# Altium PCB PCB2.PcbDoc
Units mil, origin at the board's own origin, x right, y up, seen from the top; angles counter-clockwise.
Board outline 3860 x 3510 mil, 2 copper layers (Top Layer, Bottom Layer); 31 components, 31 nets, 145 pads, 40 vias.
Unrouted connection lines stored in the file: 1.
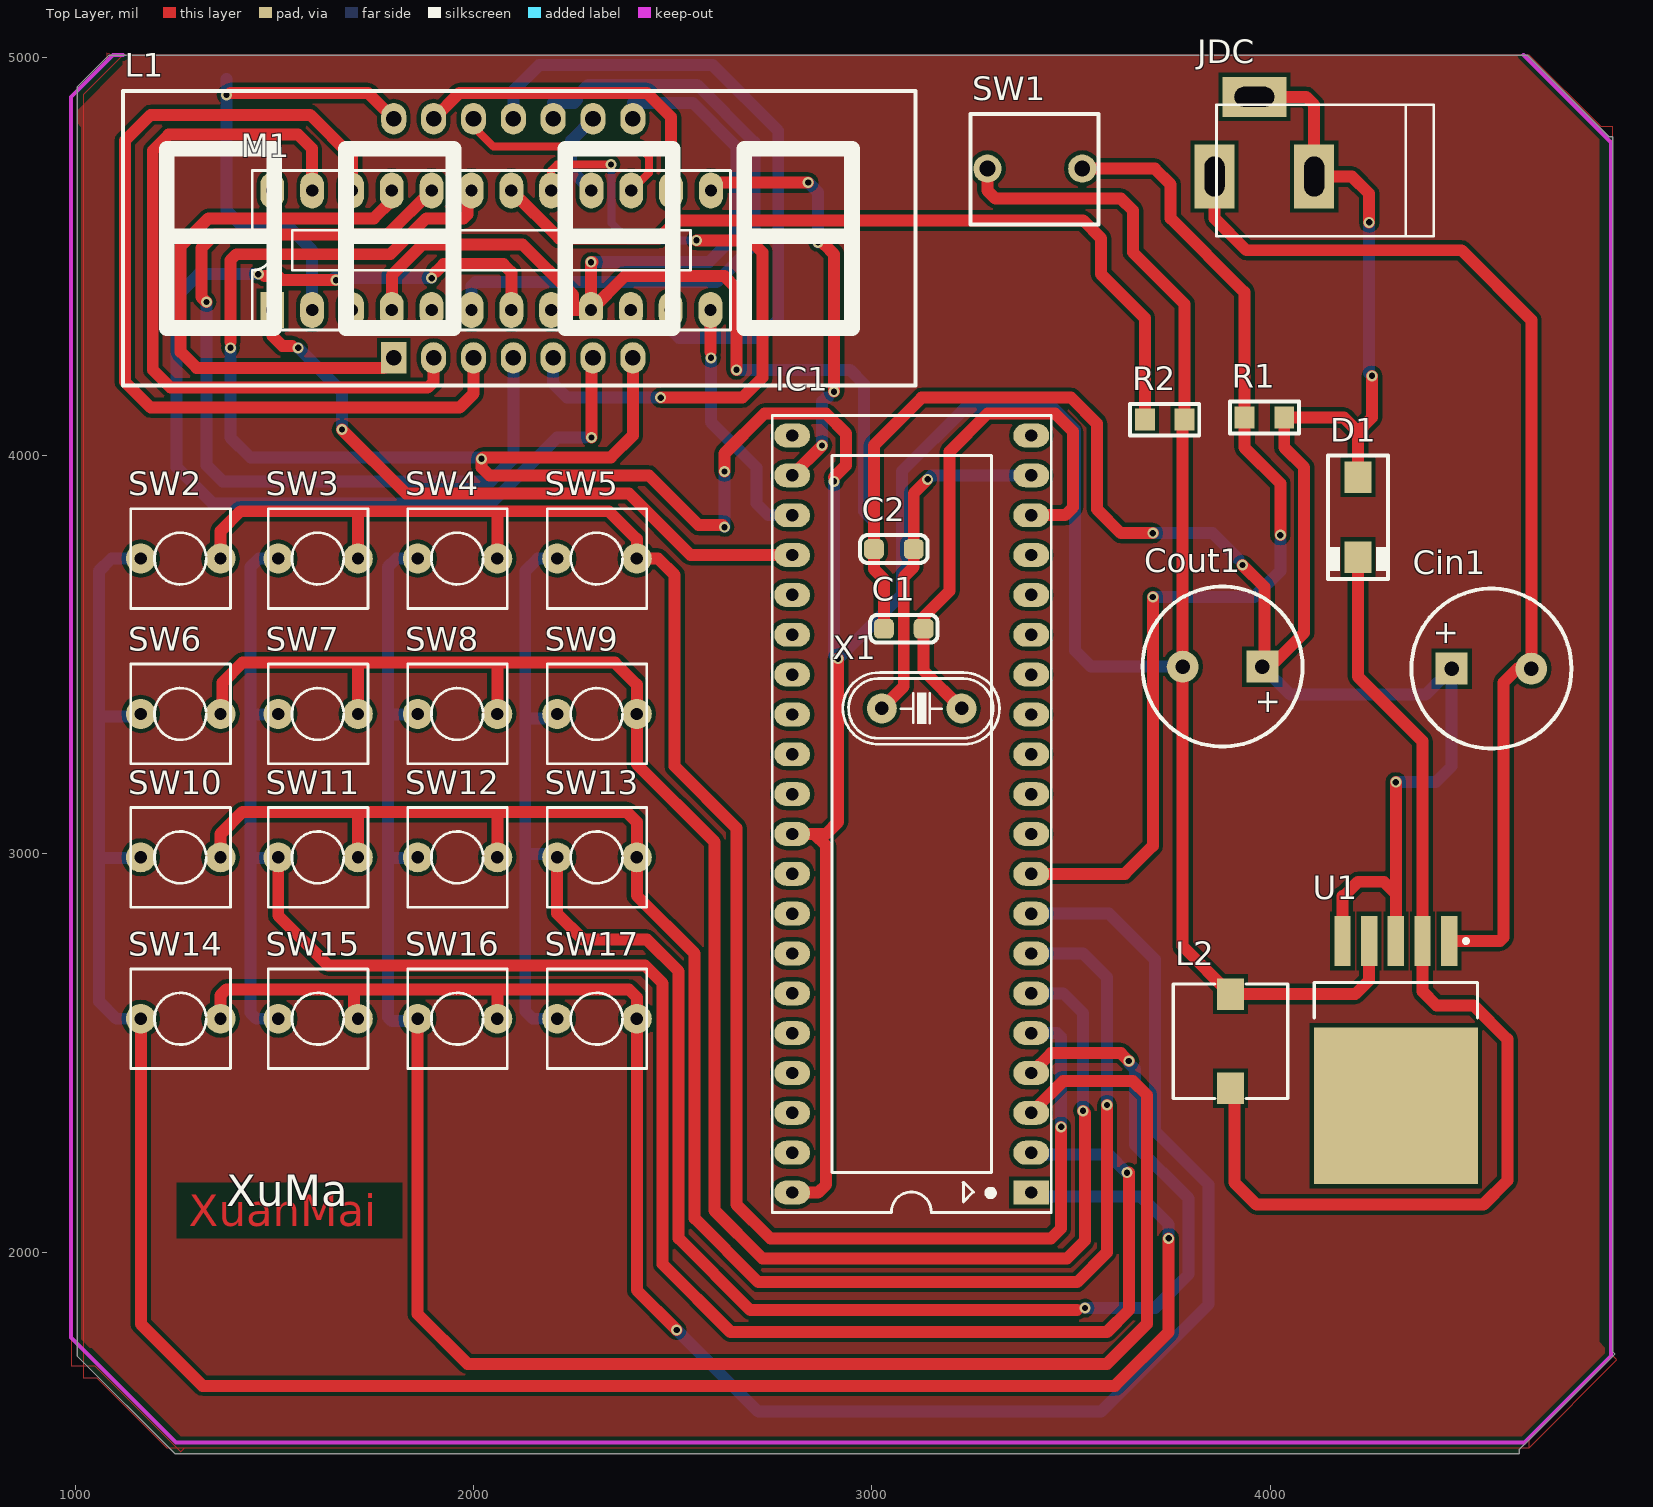
[diagram p0: Top Layer view]
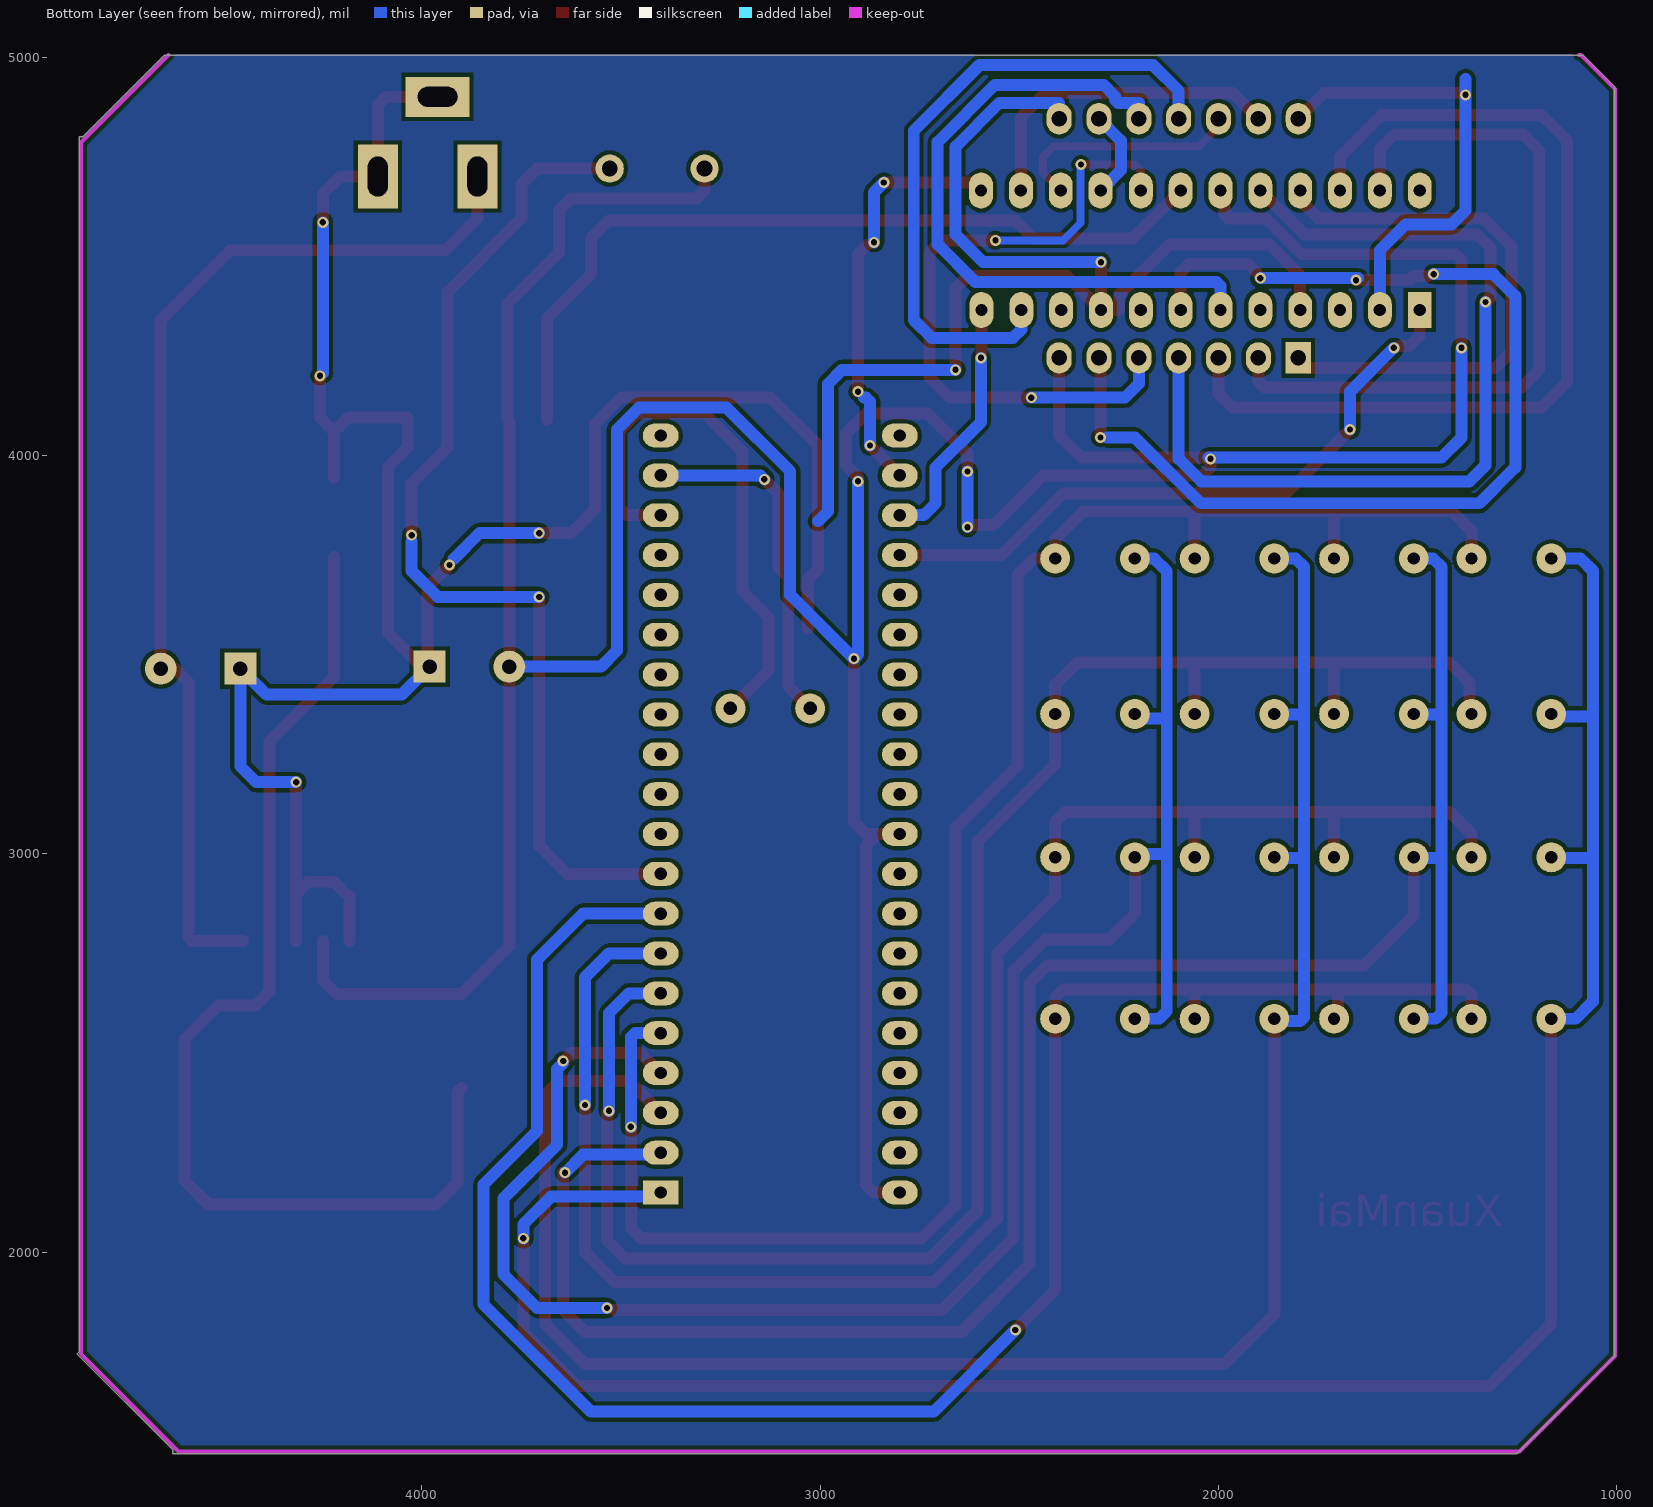
[diagram p1: Bottom Layer view, seen from below]

## Layer stack, top to bottom
Top Solder: solder mask 0.4, Solder Resist, Dk 3.5
Top Layer: signal copper 1.4
Dielectric 1: dielectric 12.6, FR-4, Dk 4.8
Bottom Layer: signal copper 1.4
Bottom Solder: solder mask 0.4, Solder Resist, Dk 3.5

## Board outline
1085,5005 1005,4925 1005,1740 1250,1495 4625,1495 4625,1505 4865,1745 4860,1750 4860,4800 4850,4800 4645,5005

## Design rules (kind name [scope] priority, off if disabled: settings)
Clearance [All] p1: gap=10 ignorepadtopadclearanceinfootprint=FALSE
PolygonConnect [All] p1: connectstyle=Relief reliefconductorwidth=10 reliefentries=4 polygonreliefangle="90 Angle" airgapwidth=10
RoutingVias [All] p1: holewidth=15.75 width=27.56 viastyle="Through Hole" minholewidth=15.75 minwidth=23.62 maxholewidth=19.68 maxwidth=27.56
SolderMaskExpansion [All] p1: expansion=4
Width [All] p1: maxlimit=40 minlimit=20 preferedwidth=30
30 further rules are at their usual default settings.

## Classes and differential pairs
component class Designator: SW2 SW3 SW4 SW5 SW6 SW7 SW8 SW9 SW10 SW11 SW12 SW13 SW14 SW15 SW16 SW17
component class "[05] - POWER": Cin1 Cout1 D1 JDC L2 U1
component class "[03] - LED7SEG": M1 R2
component class "[02] - MCU": C1 C2 IC1 R1 SW1 X1

## Components (designator, comment, footprint, x,y, rotation, side; value= is the part's Value field where it differs from the comment)
C1 "22pF" CAP_0805 3080,3565 r0 top value=103
C2 "22pF" CAP_0805 3055,3765 r0 top value=103
Cin1 "680uF" CAP_D10 4455,3465 r0 top value=100pF
Cout1 "220uF" CAP_D10 3980,3470 r180 top value=100pF
D1 "1N5822" SMA 4220,3845 r270 top value="Diode c?m 1N5408"
IC1 "AT89C52" DIP40/W0.6 3400,2150 r90 top
JDC "Jac DC" DC-IN 3985,4800 r180 top
L1 "Led 7 Seg 4 digit - Anode" LED7SEG-4-0.56-RG 2120,4540 r0 top
L2 "33uH" L-SMD-M-7.3x4.5 3900,2530 r180 top value="150 mH"
M1 "MAX7219ENG" DIP24/W0.3 1495,4365 r0 top
R1 "10k" RES_SMD_0805 3985,4095 r180 top value="R1W - 100"
R2 "10k" RES_SMD_0805 3735,4090 r0 top value="R1/4W - 1K"
SW1 "SW-2P-S" SW-2P-S 3528,4620 r180 top
SW2 "SW" SW2 1165,3741.22 r0 top value="SW chip 2 pin"
SW3 "SW" SW2 1510,3741.22 r0 top value="SW chip 2 pin"
SW4 "SW" SW2 1860,3741.22 r0 top value="SW chip 2 pin"
SW5 "SW" SW2 2210,3741.22 r0 top value="SW chip 2 pin"
SW6 "SW" SW2 1165,3351.22 r0 top value="SW chip 2 pin"
SW7 "SW" SW2 1510,3351.22 r0 top value="SW chip 2 pin"
SW8 "SW" SW2 1860,3351.22 r0 top value="SW chip 2 pin"
SW9 "SW" SW2 2210,3351.22 r0 top value="SW chip 2 pin"
SW10 "SW" SW2 1165,2991.22 r0 top value="SW chip 2 pin"
SW11 "SW" SW2 1510,2991.22 r0 top value="SW chip 2 pin"
SW12 "SW" SW2 1860,2991.22 r0 top value="SW chip 2 pin"
SW13 "SW" SW2 2210,2991.22 r0 top value="SW chip 2 pin"
SW14 "SW" SW2 1165,2586.22 r0 top value="SW chip 2 pin"
SW15 "SW" SW2 1510,2586.22 r0 top value="SW chip 2 pin"
SW16 "SW" SW2 1860,2586.22 r0 top value="SW chip 2 pin"
SW17 "SW" SW2 2210,2586.22 r0 top value="SW chip 2 pin"
U1 "LM2976" TO-263 4315,2545 r270 top
X1 "12Mhz" XT2 3125,3365 r0 top value=4Mhz

## Footprints (in the part's own frame and the unit in brackets; to place one, negate y for a bottom-side part, rotate by r counter-clockwise, add the part's x,y. Pads: shape width x height; smd on the part's side, far side on the other; paste and mask are expansions set on the pad)
CAP_0805 [mil]
  rrect50% 50x50 smd: 1(-50,0) 2(50,0)
  silkscreen extent -85,-35 85,35, body extent -40,-25 40,25, height 24
CAP_D10 [mil]
  rect 80x80 hole 36: 1(0,0)
  round 80 hole 36: 2(200,0)
  silkscreen extent -101,-201 301,201, body extent -107,-207 307,207, height 551
DC-IN [mil] "Jac DC input"
  rect 100x160 hole 50 slot 100 at 90 deg: 1(125,100) 2(-125,100)
  rect 160x100 hole 50 slot 100 at 0 deg: 3(25,-100)
  silkscreen extent -425,-80 120,250, body extent -410,-105 134,269, height 434
DIP24/W0.3 [mil] "DIP24/W.300, Pin to pin 100mil"
  rect 60x90 hole 31: 1(0,0)
  oval 60x90 hole 31: 2(100,0) 3(200,0) 4(300,0) 5(400,0) 6(500,0) 7(600,0) 8(700,0) 9(800,0) 10(900,0) 11(1000,0) 12(1100,0) 13(1101,300) 14(1001,300) 15(901,300) 16(801,300) 17(700,300) 18(600,300) 19(500,300) 20(400,300) 21(300,300) 22(200,300) 23(100,300) 24(0,300)
  silkscreen extent -50,-50 1150,350, body extent -89,-3 1181,307, height 200
DIP40/W0.6 [mil] "40 PIN, W 600mil, Pin to pin 100mil"
  rect 60x90 hole 31: 1(0,0)
  oval 60x90 hole 31: 2(100,0) 3(200,0) 4(300,0) 5(400,0) 6(500,0) 7(600,0) 8(700,0) 9(800,0) 10(900,0) 11(1000,0) 12(1100,0) 13(1200,0) 14(1300,0) 15(1400,0) 16(1500,0) 17(1600,0) 18(1700,0) 19(1800,0) 20(1900,0) 21(1900,600) 22(1800,600) 23(1700,600) 24(1600,600) 25(1500,600) 26(1400,600) 27(1300,600) 28(1200,600) 29(1100,600) 30(1000,600) 31(900,600) 32(800,600) 33(700,600) 34(600,600) 35(500,600) 36(400,600) 37(300,600) 38(200,600) 39(100,600) 40(0,600)
  silkscreen extent -50,-50 1950,650, body extent -82,-10 1982,600, height 224
L-SMD-M-7.3x4.5 [mm] "WE-PDA SMD Shielded Power Inductor, 7345"
  rect 1.7x2 smd: 1(0,3) 2(0,-3)
  silkscreen extent -3.65,-3.65 3.65,3.65, body extent -3.65,-3.65 3.65,3.65, height 4.05
LED7SEG-4-0.56-RG [mil]
  round 60 on Top Overlay: 0(-535,-205) 0(-85,-205) 0(465,-205) 0(915,-205)
  round 118.11 on Top Overlay: 0(-20,-95) 0(-20,155)
  rect 62.99x78.74 hole 39.37: 1(-320,-295)
  oval 62.99x78.74 hole 39.37: 2(-220,-295) 3(-120,-295) 4(-20,-295) 5(80,-295) 6(180,-295) 7(280,-295) 8(280,305) 9(180,305) 10(80,305) 11(-20,305) 12(-120,305) 13(-220,305) 14(-320,305)
  silkscreen extent -1000,-365 990,375, body extent -995,-370 985,378, height 565
RES_SMD_0805 [mil]
  rect 50x55 smd: 1(-50,0) 2(50,0)
  silkscreen extent -87,-40 87,39, body extent -45,-27 45,27, height 30
SMA [mm]
  rect 2x1.7 smd: 1(-2.544,0) 2(2.544,0)
  silkscreen extent -3.94,-1.9 3.94,1.91, body extent -2.87,-1.4 2.87,1.4, height 2.29
SW2 [mil] "SW button 2pin, 250x 250 mil"
  round 75 hole 31: 1(0,0) 2(200,0)
  silkscreen extent -25,-125 225,125
SW-2P-S [mm]
  round 1.8 hole 1: 1(0,-2.54) 2(6.045,-2.54)
  silkscreen extent -1.04,-6.02 7.14,1.02
TO-263 [mm]
  rect 3.2x1.05 smd: 1(-6,3.4) 2(-6,1.7) 3(-6,0) 4(-6,-1.7) 5(-6,-3.4)
  rect 10x10.45 smd: 6(4.5,0)
  silkscreen extent -6.12,-5.2 -1.1,5.2, body extent -6.58,-5.2 7.57,5.2, height 4.65
XT2 [mil] "Footpin for Crystal 2 pin"
  round 75 hole 34: 1(-100,0) 2(100,0)
  silkscreen extent -198,-90 195,90, body extent -233,-93 213,90, height 138

## Part data
C1 C2: library part C, "Cap SMD"
Cin1 Cout1: library part CAP, "Cap np  1pF - 472pF"
D1: "Schottky Rectifiers"
IC1: "Atmel AT89C52, 8k Byte Flash Memory , 40 Pin"
JDC: library part DCIN, "Jac DC input"
L1: library part LED7SEG-4-RG
L2: library part Inductor, "Inductor"
M1: "Serially Interfaced, 8-Digit LED Display Driver", Code_JEDEC=MS-001-AF, ComponentLink1Description="Manufacturer Link", ComponentLink1URL=http://www.maxim-ic.com/, ComponentLink2Description=Datasheet, ComponentLink2URL=http://pdfserv.maxim-ic.com/en/ds/MAX7219-MAX7221.pdf, DatasheetVersion=Jul-1997, LatestRevisionDate=29-May-2009, LatestRevisionNote="Component Body Added.", PackageDescription="DIP, 24-Pin, Row Spacing 7.62 mm, Pitch 2.54 mm", PackageReference=NG24A, PackageVersion=1997, Published=16-Jan-2001, Publisher="Altium Limited"
R1: library part R1W, "Resistor 1W"
R2: library part R1/4W, "Resistor 1/4W"
SW1: library part SW-2PIN-SMALL, "Switch Small 2 Pin", LatestRevisionDate=17-Jul-2002, LatestRevisionNote="Re-released for DXP Platform.", PackageReference=SPST-2, Published=24-Mar-1999, Publisher="Altium Limited"
SW2 SW3 SW4 SW5 SW6 SW7 SW8 SW9 SW10 SW11 SW12 SW13 SW14 SW15 SW16 SW17: library part SW2, "Switch button 2 pin"
U1: library part LM2596, Max Input Voltage="12 V", Max Output Current="3 (6.0 peak) A", Max Output Voltage=mV, Temperature Range="-40 to +125 degC", Category=IC-Power, Min Input Voltage=mV, Min Output Voltage=mV, Mounting Technology="Surface Mount", Status=Unreleased, Supply Voltage=mV
X1: library part XT2, "Crystal For all Crystal 2pin."

## Via types
v1: diameter 27.56, hole 15.75, Top Layer to Bottom Layer, 40 vias

## Nets (pads, with @x,y where several pads share a name; then routed paths per layer and width w, separated by ;. In a path a pad name is that pad's centre, name@x,y a point inside that pad or via, vN(x,y) a via of type N, cw(c..) or ccw(c..) an arc to the next point about the centre after c; other vN are vias at no path point)
+5: Cout1.2 IC1.31 IC1.40 L1.7 L2.2 M1.19 R2.2 SW1.2 U1.4 | length 10606.7
  Top Layer w30: 1390,4285 1390,4490 1405,4505 1791.57,4505 1881.57,4595 1975,4595 1985,4605 1985,4665 M1.19 ; L1.7 2400,4050 2345,3995 2023.43,3995 v1(2020,3991.57) 2020,3970 2040,3950 2440,3950 2565,3825 v1@2625,3825 ; v1(2630,3960) 2630,4005 2730,4105 2885,4105 2935,4055 2935,3975.16 v1@2905,3945.16 ; IC1.40 2865,2150 2885,2170 2885,3020 2855,3050 ; IC1.31 2855,3050 ; v1(2915,3490) 2915,3080 2885,3050 2855,3050 ; SW1.2 3290,4665 3310,4645 3625,4645 3655,4615 3655,4510 3785,4380 R2.2 3780,4085 Cout1.2 3780,2768.11 L2.2 4213.11,2648.11 4248.07,2683.07 U1.4
  Bottom Layer w30: v1(1390,4270) 1390,4045 1440,3995 v1@2025,3995 ; v1(2630,3820) v1(2630,3960) ; v1(2905,3935) 2905,3500 v1(2915,3490) 3075,3650 3075,3960 3235,4120 3455,4120 3510,4065 3510,3510 3550,3470 Cout1.2
D0: L1.14 M1.2 | length 1133.3
  Top Layer w30: v1@1390,4910 1735,4910 L1.14
  Bottom Layer w30: 1380,4945 1380,4615 1415,4580 1530,4580 1595,4515 M1.2@1595,4405
  other v1: 1380,4905
D1: L1.11 M1.11 | length 1651.6
  Bottom Layer w30: L1.11 2100,4915 2165,4980 2600,4980 2765,4815 2765,4340 2720,4295 2516,4295 2495,4316 M1.11
D2: L1.10 M1.6 | length 1658.3
  Bottom Layer w30: M1.6 1995,4425 2005,4435 2610,4435 2705,4530 2705,4786.57 2561.57,4930 2288.43,4930 2260,4901.57 2260,4892.77 2252.23,4885 2200,4885
D3: L1.6 M1.7 | length 2720.8
  Top Layer w30: 1475,4450 1510,4450 1520,4440 v1(1655,4440) ; 1905,4460 1925,4480 2075,4480 2095,4460 M1.7 ; v1(2296,4045) 2296,4241 L1.6
  Bottom Layer w30: v1(1460,4455) 1310,4455 1255,4400 1255,3970 1345,3880 2045,3880 2210,4045 2280,4045 ; v1@1650,4445 v1(1895,4445)
GND: C1.1 C2.1 Cin1.1 Cout1.1 D1.1 JDC.2 JDC.3 L1.8 M1.4 M1.9 R1.1 U1.3 U1.5 | length 8790
  Top Layer w30: M1.4 1795,4451.86 1873.14,4530 2122.78,4530 2250,4402.78 2250,4365 M1.9 ; v1(2295,4485) v1@2295,4481.42 ; v1@2298.58,4485 v1@2295,4481.42 ; v1(2660,4215) 2660,4420 2630,4450 2380,4450 M1.9 ; C1.1 3030,3690 3005,3715 C2.1 3005,4025 3125,4145 3500,4145 3565,4080 3565,3865 3625,3805 v1(3705,3805) ; v1(3930,3725) 3985,3670 3985,3475 Cout1.1 4000,3470 4085,3555 4085,3970 4035,4020 R1.1 4185,4095 4220,4060 ; JDC.3 4090,4900 4110,4880 JDC.2 4205,4700 4248.07,4656.93 v1(4248.07,4585) ; U1.5 4181.14,2893.86 4183.86,2893.86 4220,2930 4285,2930 4315,2900 ; D1.1 4220,4060 ; v1(4255,4200) 4255,4095 4220,4060 ; U1.3 4315,2900 ; v1(4315,3180) 4315,2900 ; M1.9 v1@2295,4481.42
  Bottom Layer w30: v1(2295,4485) 2590.71,4485 2660,4554.29 2660,4775 2550,4885 2400,4885 ; v1(2660,4215) 2945,4215 2980,4180 2980,3860 3005,3835 ; v1(3705,3805) 3855,3805 3920,3740 ; Cout1.1 4050,3400 4390,3400 Cin1.1 4455,3220 4415,3180 v1(4315,3180) ; v1@4248.07,4206.93 v1(4248.07,4585)
NetC1_2: C1.2 IC1.18 X1.2 | length 1382.5
  Top Layer w30: X1.2 3130,3460 C1.2 3130,3595 3195,3660 3195,4010 3290,4105 3460,4105 3505,4060 3505,3870 3485,3850 IC1.18
NetC2_2: C2.2 IC1.19 X1.1 | length 879.7
  Top Layer w30: X1.1 3080,3420 3080,3695 3105,3720 C2.2 3105,3905 v1@3135,3935
  Bottom Layer w30: v1(3140,3940) 3150,3950 IC1.19
NetCin1_2: Cin1.2 JDC.1 U1.1 | length 2744.9
  Top Layer w30: JDC.1 3860,4595 3940,4515 4480,4515 4655,4340 Cin1.2 4620,3465 4585,3430 4585,2790 4576.22,2781.22 U1.1
NetD1_2: D1.2 L2.1 U1.2 | length 2748.4
  Top Layer w30: L2.1 3910,2401.89 3910,2175 3965,2120 4535,2120 4595,2180 4595,2535 4510,2620 4416.93,2620 4381.93,2655 U1.2 4381.93,3283.07 4220,3445 D1.2
NetIC1_1: IC1.1 SW2.1 SW6.1 SW10.1 SW14.1 | length 5655.7
  Top Layer w30: SW14.1 1165,1820 1320,1665 3610,1665 3745,1800 v1(3745,2035) ; IC1.1 IC1.1@3405,2145
  Bottom Layer w30: SW14.1 1103.78,2586.22 1060,2630 1060,2990 ; SW10.1 1163.78,2990 1060,2990 ; SW6.1 1158.78,3345 1060,3345 ; SW2.1 1091.22,3741.22 1060,3710 1060,3345 ; IC1.1 3410,2140 3675,2140 3745,2070 v1(3745,2035) ; 1060,2990 1060,3345
NetIC1_2: IC1.2 SW3.1 SW7.1 SW11.1 SW15.1 | length 5170.3
  Top Layer w30: SW11.1 1510,2845 1635,2720 2430,2720 2475,2675 2475,1970 2645,1800 3590,1800 3645,1855 v1@3645,2200
  Bottom Layer w30: SW15.1 1455,2586.22 1440,2601.22 1440,2990 ; SW11.1 1508.78,2990 1440,2990 ; SW7.1 1508.78,3350 1440,3350 ; SW3.1 1461.22,3741.22 1440,3720 1440,3350 ; IC1.2 3405,2245 3595,2245 v1(3640,2200) ; 1440,2990 1440,3350
NetIC1_3: IC1.3 SW4.1 SW8.1 SW12.1 SW16.1 | length 5023.6
  Top Layer w30: SW16.1 1860,1845 1985,1720 3590,1720 3690,1820 3690,2395 3655,2430 3480,2430 IC1.3
  Bottom Layer w30: SW16.1 1853.78,2580 1795,2580 1785,2590 1785,2990 ; SW12.1 1858.78,2990 1785,2990 ; SW8.1 1858.78,3350 1785,3350 ; SW4.1 1806.22,3741.22 1785,3720 1785,3350 ; 1785,2990 1785,3350
NetIC1_4: IC1.4 SW5.1 SW9.1 SW13.1 SW17.1 | length 4866.2
  Top Layer w30: SW13.1 2210,2850 2275,2785 2435,2785 2515,2705 2515,2035 2695,1855 3515,1855 ; IC1.4 3450,2500 3625,2500 v1(3645,2480)
  Bottom Layer w30: SW17.1 2148.78,2586.22 2130,2605 2130,3000 ; SW13.1 2201.22,3000 2130,3000 ; SW9.1 2198.78,3340 2130,3340 ; SW5.1 2161.22,3741.22 2130,3710 2130,3340 ; v1(3535,1860) 3710,1860 3795,1945 3795,2135 3660,2270 3660,2460 v1@3645,2475 ; 2130,3000 2130,3340
NetIC1_5: IC1.5 SW2.2 SW3.2 SW4.2 SW5.2 | length 4627.8
  Top Layer w30: SW2.2 1365,3810 1415,3860 1710,3860 ; SW3.2 1710,3860 ; SW4.2 2060,3855 2065,3860 ; v1(3475,2315) 3475,2060 3450,2035 2745,2035 2660,2120 2660,3065 2505,3220 2505,3699.84 2463.62,3741.22 SW5.2 2410,3790 2340,3860 2065,3860 ; 1710,3860 2065,3860
  Bottom Layer w30: IC1.5 3465,2550 3475,2540 v1(3475,2315)
NetIC1_6: IC1.6 SW6.2 SW7.2 SW8.2 SW9.2 | length 4547.9
  Top Layer w30: SW6.2 1370,3356.22 1370,3430 1420,3480 1715,3480 ; SW7.2 1710,3475 1715,3480 ; SW8.2 2060,3475 2065,3480 ; v1(3530,2355) 3535,2350 3535,2030 3490,1985 2725,1985 2605,2105 2605,3030 2410,3225 SW9.2 2410,3425 2355,3480 2065,3480 ; 1715,3480 2065,3480
  Bottom Layer w30: IC1.6 3480,2650 3530,2600 v1(3530,2355)
NetIC1_7: IC1.7 SW10.2 SW11.2 SW12.2 SW13.2 | length 4456.7
  Top Layer w30: SW10.2 1365,3050 1420,3105 1710,3105 ; SW11.2 1710,3105 ; SW12.2 2060,3105 ; v1(3590,2370) 3590,2000 3515,1925 2715,1925 2555,2085 2555,2750 2410,2895 SW13.2 2410,3080 2385,3105 2060,3105 ; 1710,3105 2060,3105
  Bottom Layer w30: IC1.7 3530,2750 3590,2690 v1(3590,2370)
NetIC1_8: IC1.8 SW14.2 SW15.2 SW16.2 SW17.2 | length 4956.7
  Top Layer w30: SW14.2 1365,2645 1380,2660 1700,2660 ; SW15.2 1700,2596.22 1700,2660 ; SW16.2 2060,2660 ; v1(2510,1805) 2410,1905 SW17.2 2410,2640 2390,2660 2060,2660 ; 1700,2660 2060,2660
  Bottom Layer w30: v1(2510,1805) 2715,1600 3575,1600 3845,1870 3845,2170 3710,2305 3710,2735 3595,2850 IC1.8
NetIC1_9: IC1.9 R1.2 SW1.1 | length 2613.4
  Top Layer w30: IC1.9 3635,2950 3705,3020 v1(3705,3645) ; SW1.1 3710,4720 3750,4680 3750,4595 3935,4410 R1.2 3935,4020 4025,3930 v1(4025,3800)
  Bottom Layer w30: v1(3705,3645) 3960,3645 4025,3710 4025,3785
NetIC1_22: IC1.22 M1.13 | length 1028.2
  Top Layer w30: M1.13 2616,4685 v1(2840,4685) ; IC1.22 v1(2875,4025) ; 2880,4530 2905,4505 v1(2905,4160)
  Bottom Layer w30: v1(2840,4685) 2865,4660 v1(2865,4535) ; v1(2875,4025) 2875,4135 2885,4145 2890,4145
NetIC1_23: IC1.23 M1.12 | length 619.6
  Top Layer w30: 2595,4260 M1.12
  Bottom Layer w30: v1(2596,4245) 2596,4084 2710,3970 2710,3880 2740,3850 IC1.23
NetIC1_24: IC1.24 M1.1 | length 1636.4
  Top Layer w30: M1.1 1495,4300 1520,4275 1545,4275 ; v1(1670,4065) 1830,3905 2390,3905 2545,3750 IC1.24
  Bottom Layer w30: v1(1560,4270) 1670,4160 v1(1670,4065)
NetL1_1: L1.1 M1.21 | length 1429.6
  Top Layer w30: M1.21 1795,4640 1750,4595 1335,4595 1265,4525 1265,4260 1305,4220 1775,4220 L1.1
NetL1_2: L1.2 M1.23 | length 1875.9
  Top Layer w30: M1.23 1595,4770 1560,4805 1235,4805 1195,4765 1195,4215 1240,4170 1885,4170 1900,4185 L1.2
NetL1_3: L1.3 M1.22 | length 2336.8
  Top Layer w30: M1.22 1695,4750 1590,4855 1190,4855 1125,4790 1125,4185 1190,4120 1965,4120 2000,4155 L1.3
NetL1_4: L1.4 M1.20 | length 2251.7
  Top Layer w30: v1(1330,4385) 1317.5,4397.5 1317.5,4520.93 1351.57,4555 1785,4555 M1.20
  Bottom Layer w30: v1(1330,4385) 1330,3975 1370,3935 2043.43,3935 2100,3991.57 L1.4
NetL1_5: L1.5 M1.17 | length 1693.7
  Top Layer w20: M1.17 2195,4715 2210,4730 v1(2345,4730)
  Top Layer w30: v1(2470,4145) 2675,4145 2725,4195 2725,4510 2695,4540 v1(2560,4540)
  Bottom Layer w20: v1@2350,4730 2346,4726 2346,4584 2390,4540 v1@2550,4540
  Bottom Layer w30: L1.5 2200,4180 2235,4145 v1(2470,4145)
NetL1_9: L1.9 M1.16 | length 223.9
  Bottom Layer w30: M1.16 2245,4716 2245,4790 L1.9
NetL1_12: L1.12 M1.15 | length 594.3
  Top Layer w20: L1.12 2000,4825 2050,4775 2415,4775 2440,4750 2440,4709 M1.15
NetL1_13: L1.13 M1.14 | length 832.2
  Top Layer w30: L1.13 1965,4910 2435,4910 2496,4849 M1.14
NetM1_18: M1.18 R2.1 | length 2067.5
  Top Layer w30: M1.18 2215,4545 2465,4545 2510,4590 3530,4590 3575,4545 3575,4455 3685,4345 R2.1
pads on no net: IC1.10 IC1.11 IC1.12 IC1.13 IC1.14 IC1.15 IC1.16 IC1.17 IC1.20 IC1.21 IC1.25 IC1.26 IC1.27 IC1.28 IC1.29 IC1.30 IC1.32 IC1.33 IC1.34 IC1.35 IC1.36 IC1.37 IC1.38 IC1.39 L1.0 M1.3 M1.5 M1.8 M1.10 M1.24 U1.6
copper on no net: | length 94770
  Top Layer w10: 0,18615 0,31535 0,45000 ; 0,19765 0,45460 ; 0,23305 0,26075 0,23920 ; 0,34535 0,18385 0,40000

## Polygon pours and split planes (outlines as drawn)
GND on Top Layer "GND_BOTTOM" (solid, pour order 8): 1080,5010 1080,4990 990,4900 990,1715 1050,1715 1265,1500 1275,1510 4650,1510 4650,1535 4860,1745 4860,4790 4850,4790 4635,5005 1120,5005 1020,4905 1020,1685 1055,1685 1230,1510 4650,1510 4870,1730 4860,1740 4860,4825 4830,4825 4650,5005 1095,5005
no net on Top Layer "GND_BOTTOM" (solid, pour order 26): 1120,5005 1120,4980 990,4850 1015.76,4824.24 1015.76,1760 1042.5,1760 1280,1522.5 4662.5,1522.5 4870,1730 4825,1775 4825,4815 4635,5005
no net on Top Layer "GND_BOTTOM" (solid, pour order 22): 5090,1435
GND on Top Layer "GND_BOTTOM" (solid, pour order 10): 3055,4280
no net on Top Layer "GND_BOTTOM" (solid, pour order 6): 845,1085
no net on Top Layer "GND_BOTTOM" (solid, pour order 2): 405,1765
no net on Bottom Layer "GND_BOTTOM" (solid, pour order 28): 1087.5,5007.5 1087.5,4997.5 1000,4910 1005,4905 1005,1740 1240,1505 1250,1515 4615,1515 4870,1770 4855,1785 4855,4775 4622.5,5007.5
GND on Bottom Layer "GND_BOTTOM" (solid, pour order 20): 4980,3755

## Keep-outs
Top Layer:
  lines w10: 1120,5005 1095,5005 990,4900 990,1785.76 1253.26,1522.5 4637.5,1522.5 4855,1740 4855,4785 4635,5005
Bottom Layer:
  lines w10: 1095,5005 1090,5005 1005,4920 1005,1740 1245,1500 4610,1500 4855,1745 4855,4785 4635,5005

## Other copper
Top Layer:
  text "XuanMai" at 1285,2065 h80

## Silkscreen, mask and mechanical layers (free items; w line width, h text height)
Top Overlay:
  text "XuMa" at 1380,2115 h80
Drill Drawing:
  lines w10: 0,41765 0,99999

## Text inside footprints (layer, text, board x,y; h text height)
Cin1: Top Overlay "+" at 4486,3520 h100 r90
Cout1: Top Overlay "+" at 3949,3415 h100 r270